# EAGLE board arduino (EAGLE 9.5.2)
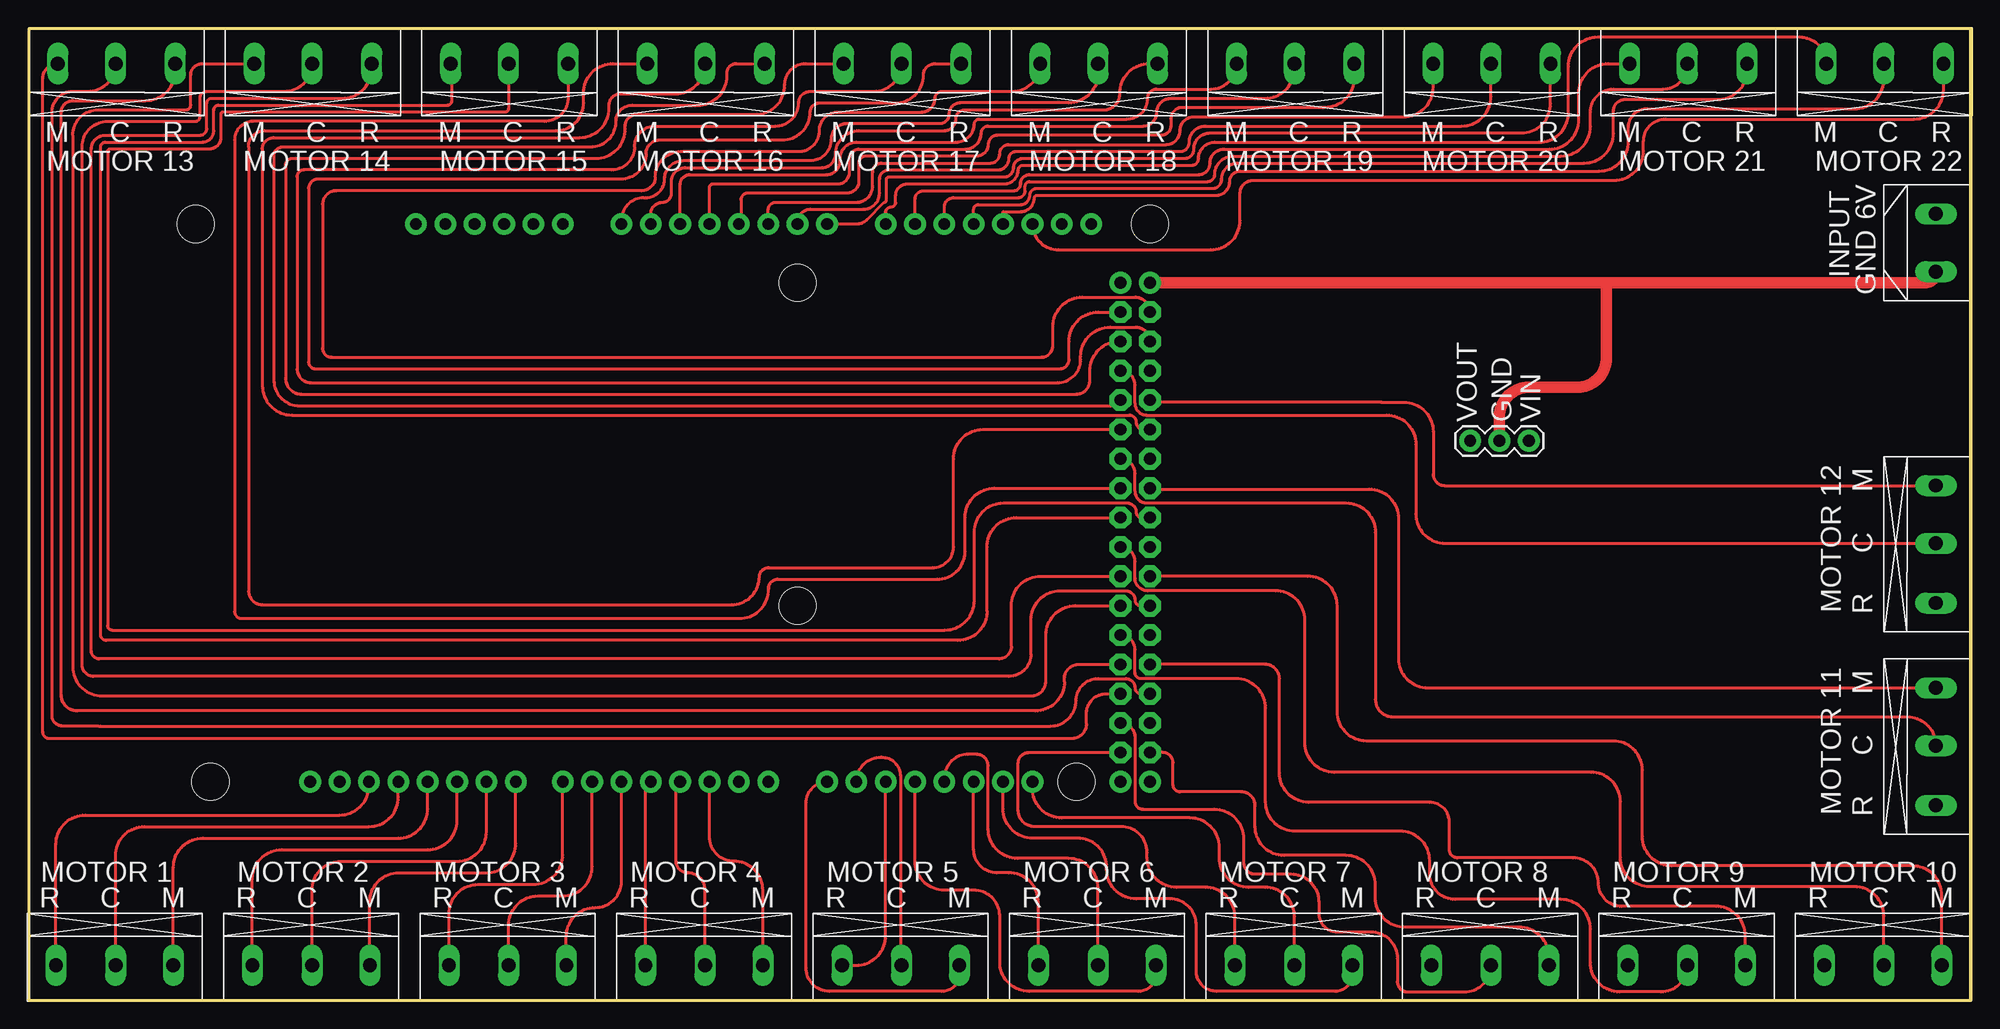
[diagram p0: board, top side]
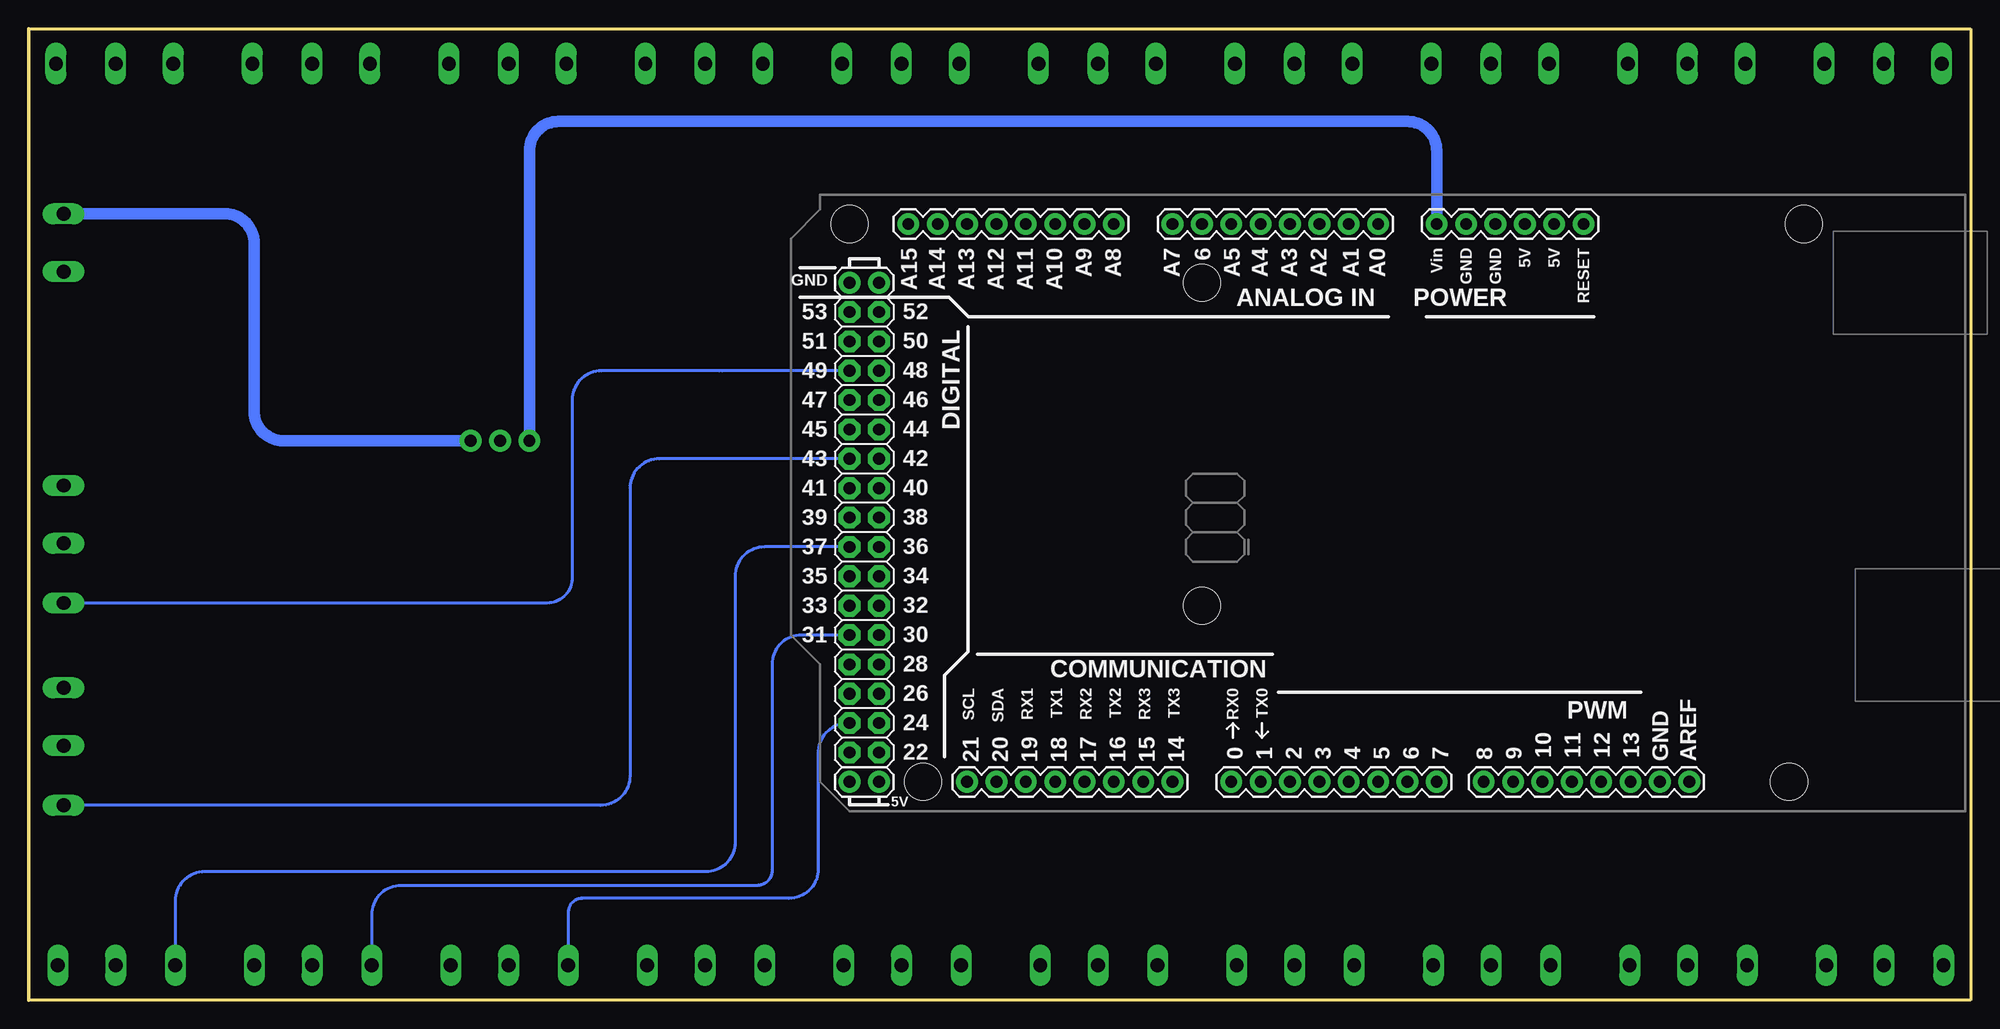
[diagram p1: board, bottom side, seen from below]

Size 168 x 84 mm. Coordinates in mm from the lower left corner, seen from the top.
Outline: 0,0 168,0 168,84 0,84 0,0
Copper layers (1*16): Top 0.0356mm / dielectric 1.5011mm / Bottom 0.0356mm
Design rules "oshpark-2layer": minimum track width 6mil, minimum drill 13mil, track to track 6mil, track to pad 6mil, pad to pad 6mil, via to via 6mil, smd to smd 6mil, copper to edge 15mil, drill to drill 6mil, minimum pad ring 7mil, minimum via ring 7mil, stop-mask expansion 2.5mil, vias tented up to drill 0mil, thermal gap 10mil

## Footprints (pad centres in the part's own frame; a part is rotated, then mirrored left to right if it is on the bottom)
ARDUINO_MEGA = drill 1.016 pad 1.88: 0 13.97,24.13; 1 11.43,24.13; 2 8.89,24.13; 3 6.35,24.13; 3.3V -13.97,-24.13; 4 3.81,24.13; 5 1.27,24.13; 5V@0 -11.43,-24.13; 5V@1 44.45,24.13; 5V@2 46.99,24.13; 6 -1.27,24.13; 7 -3.81,24.13; 8 -7.874,24.13; 9 -10.414,24.13; 10 -12.954,24.13; 11 -15.494,24.13; 12 -18.034,24.13; 13 -20.574,24.13; 14 19.05,24.13; 15 21.59,24.13; 16 24.13,24.13; 17 26.67,24.13; 18 29.21,24.13; 19 31.75,24.13; 20 34.29,24.13; 21 36.83,24.13; A0 1.27,-24.13; A1 3.81,-24.13; A2 6.35,-24.13; A3 8.89,-24.13; A4 11.43,-24.13; A5 13.97,-24.13; A6 16.51,-24.13; A7 19.05,-24.13; A8 24.13,-24.13; A9 26.67,-24.13; A10 29.21,-24.13; A11 31.75,-24.13; A12 34.29,-24.13; A13 36.83,-24.13; A14 39.37,-24.13; A15 41.91,-24.13; AREF -25.654,24.13; GND@0 -8.89,-24.13; GND@1 -6.35,-24.13; GND@2 44.45,-19.05; GND@3 46.99,-19.05; GND@4 -23.114,24.13; RESET -16.51,-24.13; VIN -3.81,-24.13 | drill 1.016 pad 1.88 octagon: 22 44.45,21.59; 23 46.99,21.59; 24 44.45,19.05; 25 46.99,19.05; 26 44.45,16.51; 27 46.99,16.51; 28 44.45,13.97; 29 46.99,13.97; 30 44.45,11.43; 31 46.99,11.43; 32 44.45,8.89; 33 46.99,8.89; 34 44.45,6.35; 35 46.99,6.35; 36 44.45,3.81; 37 46.99,3.81; 38 44.45,1.27; 39 46.99,1.27; 40 44.45,-1.27; 41 46.99,-1.27; 42 44.45,-3.81; 43 46.99,-3.81; 44 44.45,-6.35; 45 46.99,-6.35; 46 44.45,-8.89; 47 46.99,-8.89; 48 44.45,-11.43; 49 46.99,-11.43; 50 44.45,-13.97; 51 46.99,-13.97; 52 44.45,-16.51; 53 46.99,-16.51 | hole 3.2: -34.29,24.13; -35.56,-24.13; 16.51,8.89; 16.51,-19.05; 40.64,24.13; 46.99,-24.13
KF301-2P = drill 1.2 pad 1.778 long: 1 -2.5,0; 2 2.5,0
KF301-3P = drill 1.2 pad 1.778 long: 1 -2.5,0; 2 2.5,0; 3 7.66,0
1X03 = drill 1.016 pad 1.88: 1 0,0; 2 2.54,0; 3 5.08,0

## Placement (x,y rotation side)
B1  ARDUINO_MEGA_R3FULL  [ARDUINO_MEGA]  50,43 180 bottom
FRAME1  FRAME-LETTERNO_PACKAGE  [DUMMY]  -81.28,70.48 0 top  (outside the outline)
INPUT  TERMINAL_2P  [KF301-2P]  165,65.5 270 top
MOTOR1  KF301-3P  [KF301-3P]  146,3 180 top
MOTOR2  KF301-3P  [KF301-3P]  5,81 0 top
MOTOR3  KF301-3P  [KF301-3P]  129,3 180 top
MOTOR4  KF301-3P  [KF301-3P]  112,3 180 top
MOTOR5  KF301-3P  [KF301-3P]  95,3 180 top
MOTOR6  KF301-3P  [KF301-3P]  78,3 180 top
MOTOR7  KF301-3P  [KF301-3P]  90,81 0 top
MOTOR8  KF301-3P  [KF301-3P]  107,81 0 top
MOTOR9  KF301-3P  [KF301-3P]  124,81 0 top
MOTOR10  KF301-3P  [KF301-3P]  158,81 0 top
MOTOR11  KF301-3P  [KF301-3P]  141,81 0 top
MOTOR15  KF301-3P  [KF301-3P]  22,81 0 top
MOTOR16  KF301-3P  [KF301-3P]  163,3 180 top
MOTOR17  KF301-3P  [KF301-3P]  39,81 0 top
MOTOR18  KF301-3P  [KF301-3P]  165,24.5 270 top
MOTOR19  KF301-3P  [KF301-3P]  56,81 0 top
MOTOR20  KF301-3P  [KF301-3P]  165,42 270 top
MOTOR21  KF301-3P  [KF301-3P]  73,81 0 top
MOTOR23  KF301-3P  [KF301-3P]  61,3 180 top
MOTOR24  KF301-3P  [KF301-3P]  44,3 180 top
MOTOR25  KF301-3P  [KF301-3P]  27,3 180 top
MOTOR26  KF301-3P  [KF301-3P]  10,3 180 top
REGULATOR  [1X03]  129.78,48.37 180 top

## Library data of the parts
B1 = SparkFun-Boards
FRAME1 = SparkFun-Aesthetics; DESIGNER: Nobody; VERSION: v01
INPUT = KF301-2P-Terminal
MOTOR1-MOTOR11 MOTOR15-MOTOR21 MOTOR23-MOTOR26 = KF301-3P
REGULATOR = SparkFun-Connectors

## Nets
GND: B1.GND@3 INPUT.2 REGULATOR.2
N$1: B1.2 MOTOR23.1
N$2: B1.3 MOTOR23.2
N$3: B1.4 MOTOR23.3
N$4: B1.5 MOTOR24.1
N$5: B1.6 MOTOR24.2
N$6: B1.7 MOTOR24.3
N$7: B1.8 MOTOR25.1
N$8: B1.9 MOTOR25.2
N$9: B1.10 MOTOR25.3
N$10: B1.13 MOTOR26.3
N$11: B1.11 MOTOR26.1
N$12: B1.12 MOTOR26.2
N$13: B1.14 MOTOR6.1
N$14: B1.15 MOTOR6.2
N$15: B1.16 MOTOR6.3
N$16: B1.17 MOTOR5.1
N$17: B1.18 MOTOR5.2
N$18: B1.19 MOTOR5.3
N$19: B1.20 MOTOR4.1
N$20: B1.21 MOTOR4.2
N$21: B1.22 MOTOR4.3
N$22: B1.23 MOTOR3.1
N$23: B1.24 MOTOR3.2
N$24: B1.25 MOTOR3.3
N$25: B1.26 MOTOR2.1
N$26: B1.27 MOTOR2.2
N$27: B1.28 MOTOR2.3
N$28: B1.29 MOTOR1.1
N$29: B1.30 MOTOR1.2
N$30: B1.31 MOTOR1.3
N$31: B1.32 MOTOR15.1
N$32: B1.33 MOTOR15.2
N$33: B1.34 MOTOR15.3
N$34: B1.35 MOTOR16.1
N$35: B1.36 MOTOR16.2
N$36: B1.37 MOTOR16.3
N$37: B1.38 MOTOR17.1
N$38: B1.39 MOTOR17.2
N$39: B1.40 MOTOR17.3
N$40: B1.41 MOTOR18.1
N$41: B1.42 MOTOR18.2
N$42: B1.43 MOTOR18.3
N$43: B1.44 MOTOR19.1
N$44: B1.45 MOTOR19.2
N$45: B1.46 MOTOR19.3
N$46: B1.47 MOTOR20.1
N$47: B1.48 MOTOR20.2
N$48: B1.49 MOTOR20.3
N$49: B1.50 MOTOR21.1
N$50: B1.51 MOTOR21.2
N$51: B1.52 MOTOR21.3
N$52: B1.53 MOTOR7.1
N$53: B1.A0 MOTOR7.2
N$54: B1.A1 MOTOR7.3
N$55: B1.A2 MOTOR8.1
N$56: B1.A3 MOTOR8.2
N$57: B1.A4 MOTOR8.3
N$58: B1.A5 MOTOR9.1
N$59: B1.A6 MOTOR9.2
N$60: B1.A7 MOTOR9.3
N$61: B1.A8 MOTOR10.1
N$62: B1.A12 MOTOR10.2
N$63: B1.A13 MOTOR10.3
N$64: B1.A9 MOTOR11.1
N$65: B1.A10 MOTOR11.2
N$66: B1.A11 MOTOR11.3
N$67: B1.VIN REGULATOR.3
PWR: INPUT.1 REGULATOR.1

## Tracks (layer width: path | path; a pad name or v marks a point on that pad's centre or on a via)
GND
  Top 1.016: REGULATOR.2 127.24,50.46 arc-90 129.78,53 133.96,53 arc90 136.5,55.54 136.5,62.05 | B1.GND@3 136.5,62.05 | 136.5,62.05 164.05,62.05 arc90 INPUT.2
N$1
  Top 0.254: MOTOR23.1 63.5,9.5 arc90 61,12 arc-90 58.89,14.11 B1.2
N$2
  Top 0.254: MOTOR23.2 58.5,9.5 arc90 57,11 arc-90 56,12 56,18.52 arc-90 B1.3
N$3
  Top 0.254: MOTOR23.3 53.34,18.4 arc-90 B1.4
N$4
  Top 0.254: MOTOR24.1 46.5,5.5 arc-90 49,8 arc90 51.27,10.27 B1.5
N$5
  Top 0.254: MOTOR24.2 41.5,6.46 arc-90 44.04,9 46.19,9 arc90 48.73,11.54 B1.6
N$6
  Top 0.254: MOTOR24.3 36.34,7.46 arc-90 38.88,10 43.65,10 arc90 46.19,12.54 B1.7
N$7
  Top 0.254: MOTOR25.1 29.5,8.5 arc-90 32,11 39.59,11 arc90 42.13,13.54 B1.8
N$8
  Top 0.254: MOTOR25.2 24.5,9.5 arc-90 27,12 37.05,12 arc90 39.59,14.54 B1.9
N$9
  Top 0.254: MOTOR25.3 19.34,10.46 arc-90 21.88,13 34.51,13 arc90 37.05,15.54 B1.10
N$10
  Top 0.254: MOTOR26.3 2.34,13.46 arc-90 4.88,16 26.89,16 arc90 29.43,18.54 B1.13
N$11
  Top 0.254: MOTOR26.1 12.5,11.46 arc-90 15.04,14 31.97,14 arc90 34.51,16.54 B1.11
N$12
  Top 0.254: MOTOR26.2 7.5,12.5 arc-90 10,15 29.43,15 arc90 31.97,17.54 B1.12
N$13
  Top 0.254: MOTOR6.1 80.5,2.25 arc-90 79,0.75 69.25,0.75 arc-90 67.25,2.75 67.25,17.07 arc-90 B1.14
N$14
  Top 0.254: B1.15 arc-90 73.72,21 73.8,21 arc-90 75.4,19.4 75.4,3.1 arc90 MOTOR6.2
N$15
  Top 0.254: MOTOR6.3 71.59,3 arc90 74.13,5.54 B1.16
N$16
  Top 0.254: MOTOR5.1 97.5,2.25 arc-90 96,0.75 86.54,0.75 arc-90 84,3.29 84,7.25 arc90 81.75,9.5 79.21,9.5 arc-90 76.67,12.04 B1.17
N$17
  Top 0.254: MOTOR5.2 92.5,9.71 arc90 89.96,12.25 85.54,12.25 arc-90 83,14.79 83,20.25 arc90 82,21.25 81.25,21.25 arc90 79.21,19.21 B1.18
N$18
  Top 0.254: MOTOR5.3 87.34,8.46 arc90 84.8,11 83.75,11 arc-90 81.75,13 B1.19
N$19
  Top 0.254: MOTOR4.1 114.5,2.25 arc-90 113,0.75 102.75,0.75 arc-90 101,2.5 101,6.5 arc90 98.75,8.75 95.79,8.75 arc-90 93.25,11.29 93.25,11.5 arc90 90.75,14 86.83,14 arc-90 84.29,16.54 B1.20
N$20
  Top 0.254: MOTOR4.2 109.5,7.21 arc90 106.96,9.75 105.54,9.75 arc-90 103,12.29 103,13.21 arc90 100.46,15.75 89.37,15.75 arc-90 86.83,18.29 B1.21
N$21
  Top 0.254: MOTOR4.3 104.34,7.21 arc90 101.8,9.75 99.29,9.75 arc-90 96.75,12.29 96.75,12.75 arc90 94.5,15 87,15 arc-90 85.6,16.4 85.6,20.5 arc-90 86.51,21.41 B1.22
N$22
  Top 0.254: MOTOR3.1 131.5,3.76 arc90 128.96,6.3 119.04,6.3 arc-90 116.5,8.84 116.5,9.96 arc90 113.96,12.5 108.6,12.5 arc-90 106.1,15 106.1,16.8 arc90 104.9,18 99.6,18 arc-90 99,18.6 99,20.5 arc90 98.09,21.41 B1.23
N$23
  Top 0.254: B1.24 arc-90 95.7,22.7 95.7,17.2 arc90 96.4,16.5 102.56,16.5 arc-90 105.1,13.96 105.1,11.9 arc90 106.1,10.9 109.2,10.9 arc-90 111.6,8.5 111.6,7.5 arc90 113.2,5.9 116.1,5.9 arc-90 118.4,3.6 118.4,1.6 arc90 119.3,0.7 124.2,0.7 arc90 MOTOR3.2
N$24
  Bottom 0.254: B1.25 97.16,23.95 arc-90 99.7,21.41 99.7,11.34 arc90 102.24,8.8 120.1,8.8 arc-90 121.34,7.56 MOTOR3.3
N$25
  Top 0.254: B1.26 93.19,26.49 arc90 91.5,24.8 91.5,23.9 arc-90 90.2,22.6 1.8,22.6 arc-90 1.2,23.2 1.2,79.7 arc-90 MOTOR2.1
N$26
  Top 0.254: B1.27 96.21,26.49 arc-90 95.7,27 arc90 94.9,27.8 92.5,27.8 arc90 90.6,25.9 arc-90 88.4,23.7 6.2,23.7 6.04,23.7 2.9,23.7 arc-90 2,24.6 2,76.8 arc-90 3.8,78.6 5.1,78.6 arc90 MOTOR2.2
N$27
  Top 0.254: B1.28 90.83,29.03 arc90 89.6,27.8 89.6,27.54 arc-90 87.06,25 4.2,25 arc-90 2.8,26.4 2.8,76.8 arc-90 3.8,77.8 10.12,77.8 arc90 12.66,80.34 MOTOR2.3
N$28
  Top 0.254: MOTOR1.1 148.5,5.56 arc90 145.96,8.1 137.8,8.1 arc-90 135.8,10.1 arc90 133.6,12.3 123.6,12.3 arc-90 122.9,13 122.9,15.4 arc90 121.2,17.1 110.74,17.1 arc-90 108.2,19.64 108.2,27.8 arc90 106.97,29.03 B1.29
N$29
  Top 0.254: MOTOR1.2 arc-90 141.2,0.7 137.64,0.7 arc-90 135.1,3.24 135.1,6.16 arc90 132.56,8.7 123.4,8.7 arc-90 121.2,10.9 121.2,12.06 arc90 118.66,14.6 109.54,14.6 arc-90 107,17.14 107,25.26 arc90 104.46,27.8 96.2,27.8 arc-90 95.7,28.3 95.7,30.32 arc90 B1.30
N$30
  Bottom 0.254: B1.31 101.16,31.57 arc-90 103.7,29.03 103.7,11.2 arc90 105,9.9 135.8,9.9 arc-90 138.34,7.36 MOTOR1.3
N$31
  Top 0.254: B1.32 90.54,34.11 arc90 88,31.57 88,27.6 arc-90 86.7,26.3 6.34,26.3 arc-90 3.8,28.84 3.8,74.8 arc-90 6,77 13.6,77 arc90 14,77.4 14,80 arc-90 15,81 MOTOR15.1
N$32
  Top 0.254: B1.33 96.19,34.11 arc-90 95.7,34.6 arc90 94.9,35.4 89.24,35.4 arc90 86.7,32.86 86.7,29.9 arc-90 84.8,28 5.6,28 arc-90 4.6,29 4.6,73.8 arc-90 6.8,76 14.4,76 arc90 14.8,76.4 14.8,78 arc-90 15.4,78.6 22.1,78.6 arc90 MOTOR15.2
N$33
  Top 0.254: B1.34 87.54,36.65 arc90 85,34.11 85,30.6 arc-90 83.9,29.5 6.1,29.5 arc-90 5.4,30.2 5.4,73.6 arc-90 6.6,74.8 14.8,74.8 arc90 15.4,75.4 15.4,77.6 arc-90 15.8,78 27.12,78 arc90 29.66,80.54 MOTOR15.3
N$34
  Top 0.254: MOTOR16.1 165.5,9.06 arc90 162.96,11.6 142.14,11.6 arc-90 139.6,14.14 139.6,19.9 arc90 137.1,22.4 115.74,22.4 arc-90 113.2,24.94 113.2,34.11 arc90 110.66,36.65 B1.35
N$35
  Top 0.254: MOTOR16.2 160.5,7.26 arc90 157.96,9.8 140.24,9.8 arc-90 137.7,12.34 137.7,17.16 arc90 135.16,19.7 112.94,19.7 arc-90 110.4,22.24 110.4,32.86 arc90 107.86,35.4 96.8,35.4 arc-90 95.7,36.5 95.7,37.94 arc90 B1.36
N$36
  Bottom 0.254: B1.37 104.36,39.19 arc-90 106.9,36.65 106.9,13.64 arc90 109.44,11.1 152.8,11.1 arc-90 155.34,8.56 MOTOR16.3
N$37
  Top 0.254: B1.38 85.44,41.73 arc90 82.9,39.19 82.9,33.64 arc-90 80.36,31.1 6.7,31.1 arc-90 6.2,31.6 6.2,73.8 arc-90 6.6,74.2 15,74.2 arc90 16,75.2 16,77 arc-90 16.4,77.4 36.2,77.4 arc90 36.6,77.8 36.6,80.9 arc90 MOTOR17.1
N$38
  Top 0.254: MOTOR17.2 41.5,77.1 arc-90 41.2,76.8 16.8,76.8 arc90 16.6,76.6 16.6,74.6 arc-90 15.6,73.6 7,73.6 arc90 6.8,73.4 6.8,32.4 arc90 7.2,32 79.26,32 arc90 81.8,34.54 81.8,40.46 arc-90 84.34,43 95,43 arc-90 95.8,42.2 arc90 96.27,41.73 B1.39
N$39
  Top 0.254: MOTOR17.3 46.66,78.06 arc-90 44.6,76 19.4,76 arc90 17.8,74.4 17.8,33.6 arc90 18.4,33 61.46,33 arc90 64,35.54 64,35.6 arc-90 64.8,36.4 78.6,36.4 arc90 81,38.8 81,41.73 arc-90 83.54,44.27 B1.40
N$40
  Top 0.254: B1.41 arc90 97.06,44.2 115.96,44.2 arc-90 118.5,41.66 118.5,29.54 arc90 121.04,27 MOTOR18.1
N$41
  Top 0.254: B1.42 arc-90 95.7,45.56 95.7,44 arc90 96.7,43 113.96,43 arc-90 116.5,40.46 116.5,26 arc90 118,24.5 162.5,24.5 arc-90 MOTOR18.2
N$42
  Bottom 0.254: MOTOR18.3 118.54,16.84 arc-90 116,19.38 116,44.27 arc90 113.46,46.81 B1.43
N$43
  Top 0.254: B1.44 82.54,49.35 arc90 80,46.81 80,39.2 arc-90 78.2,37.4 64,37.4 arc90 63.2,36.6 arc-90 60.8,34.2 20.2,34.2 arc-90 19,35.4 19,73.8 arc-90 20.4,75.2 45.6,75.2 arc90 48,77.6 48,78.46 arc-90 50.54,81 MOTOR19.1
N$44
  Top 0.254: B1.45 96.45,49.35 arc-90 95.8,50 arc90 95.2,50.6 22.74,50.6 arc-90 20.2,53.14 20.2,73.6 arc-90 21.2,74.6 47.66,74.6 arc90 50.2,77.14 50.2,77.4 arc-90 51.2,78.4 55.96,78.4 arc90 58.5,80.94 MOTOR19.2
N$45
  Top 0.254: B1.46 arc-90 93.96,51.4 23.4,51.4 arc-90 21.2,53.6 21.2,73 arc-90 22,73.8 48.6,73.8 arc90 50.8,76 arc-90 52.2,77.4 57.86,77.4 arc90 60.4,79.94 60.4,80.2 arc-90 61.2,81 MOTOR19.3
N$46
  Top 0.254: B1.47 arc90 97.18,51.7 117,51.7 117.06,51.7 118.96,51.7 arc-90 121.5,49.16 121.5,45.5 arc90 122.5,44.5 MOTOR20.1
N$47
  Top 0.254: B1.48 arc-90 95.7,53.18 95.7,51.6 arc90 96.7,50.6 117.46,50.6 arc-90 120,48.06 120,42.04 arc90 122.54,39.5 MOTOR20.2
N$48
  Bottom 0.254: B1.49 108,54.43 108.26,54.43 118.46,54.43 arc-90 121,51.89 121,36.5 arc90 123.16,34.34 MOTOR20.3
N$49
  Top 0.254: B1.50 94.34,56.97 arc90 91.8,54.43 91.8,53.6 arc-90 90.6,52.4 23.6,52.4 arc-90 22.2,53.8 22.2,72.2 arc-90 22.8,72.8 49.06,72.8 arc90 51.6,75.34 51.6,75.6 arc-90 52.6,76.6 62.86,76.6 arc90 65.4,79.14 65.4,79.2 arc-90 67.2,81 MOTOR21.1
N$50
  Top 0.254: B1.51 arc90 95.76,58.2 93.54,58.2 arc90 91,55.66 91,55.4 arc-90 89,53.4 24.4,53.4 arc-90 23.2,54.6 23.2,71.2 arc-90 23.8,71.8 50.4,71.8 arc90 52.4,73.8 arc-90 54.2,75.6 64.6,75.6 arc90 66.6,77.6 arc-90 67.6,78.6 73.1,78.6 arc90 MOTOR21.2
N$51
  Top 0.254: B1.52 92.54,59.51 arc90 90,56.97 90,55.4 arc-90 89.2,54.6 24.8,54.6 arc-90 24.2,55.2 24.2,70.2 arc-90 25,71 51.2,71 arc90 53.4,73.2 arc-90 54.6,74.4 65.2,74.4 arc90 67.6,76.8 arc-90 68.4,77.6 75,77.6 arc90 77.4,80 arc-90 78.4,81 MOTOR21.3
N$52
  Top 0.254: B1.53 arc90 95.7,60.8 91.14,60.8 arc90 88.6,58.26 88.6,56.6 arc-90 87.6,55.6 26.2,55.6 arc-90 25.4,56.4 25.4,68.8 arc-90 26.6,70 53,70 arc90 54.2,71.2 arc-90 56.4,73.4 66.6,73.4 arc90 68.4,75.2 arc-90 70,76.8 77.2,76.8 arc90 78.4,78 arc-90 79,78.6 85.1,78.6 arc90 MOTOR7.1
N$53
  Top 0.254: MOTOR7.2 92.5,80.14 arc-90 89.96,77.6 80.6,77.6 arc90 79.6,76.6 arc-90 78.8,75.8 70.8,75.8 arc90 69.4,74.4 arc-90 67.6,72.6 56.6,72.6 arc90 55,71 arc-90 53.4,69.4 53.2,69.4 arc90 51.27,67.47 B1.A0
N$54
  Top 0.254: MOTOR7.3 96.94,81 arc90 94.4,78.46 94.4,78.4 arc-90 93,77 81,77 arc90 80.2,76.2 arc-90 79.2,75.2 71.8,75.2 arc90 69.8,73.2 arc-90 68.6,72 56.8,72 arc90 55.6,70.8 55.6,69.8 arc-90 54.8,69 arc90 53.81,68.01 B1.A1
N$55
  Top 0.254: MOTOR8.1 arc-90 102.3,78.8 97.6,78.8 arc90 96.8,78 arc-90 95,76.2 82.2,76.2 arc90 81.8,75.8 arc-90 80.2,74.2 71.6,74.2 arc90 70.2,72.8 70.2,72.6 arc-90 69,71.4 57.2,71.4 arc90 56.35,70.55 B1.A2
N$56
  Top 0.254: MOTOR8.2 109.5,80.54 arc-90 106.96,78 98.8,78 arc90 97.6,76.8 arc-90 96.4,75.6 83,75.6 arc90 82.4,75 arc-90 81,73.6 71.8,73.6 arc90 71,72.8 71,71.6 arc-90 70,70.6 59.2,70.6 arc90 58.89,70.29 B1.A3
N$57
  Top 0.254: MOTOR8.3 114.66,79.74 arc-90 112.12,77.2 99.8,77.2 arc90 98.8,76.2 98.8,75.6 arc-90 98,74.8 83.8,74.8 arc90 83,74 arc-90 82,73 72.4,73 arc90 71.8,72.4 71.8,70.8 arc-90 70.8,69.8 62.2,69.8 arc90 61.6,69.2 61.6,67.3 arc-90 B1.A4
N$58
  Top 0.254: B1.A5 63.97,68.37 arc-90 64.6,69 71.6,69 arc90 73,70.4 73,71.6 arc-90 73.8,72.4 83.2,72.4 arc90 84,73.2 arc-90 84.8,74 98.4,74 arc90 99.6,75.2 arc-90 100.8,76.4 118.96,76.4 arc90 121.5,78.94 MOTOR9.1
N$59
  Top 0.254: B1.A6 66.51,67.31 arc-90 67.6,68.4 72.2,68.4 arc90 73.6,69.8 73.6,71 arc-90 74.4,71.8 83,71.8 83.2,71.8 83.8,71.8 arc90 84.8,72.8 arc-90 85.4,73.4 99.6,73.4 arc90 100.4,74.2 arc-90 101.8,75.6 123.96,75.6 arc90 126.5,78.14 MOTOR9.2
N$60
  Top 0.254: B1.A7 71.6,67.13 arc45 72.5,67.5 74,69 arc90 74.2,69.2 74.2,71 arc-90 74.4,71.2 84.4,71.2 arc90 85.2,72 arc-90 86,72.8 100,72.8 arc90 100.8,73.6 arc-90 102.2,75 129.12,75 arc90 131.66,77.54 MOTOR9.3
N$61
  Top 0.254: B1.A8 74.13,68.13 arc-90 74.6,68.6 arc90 75,69 75,69.6 arc-90 76,70.6 84.4,70.6 arc90 85.6,71.8 arc-90 86,72.2 100.6,72.2 arc90 101.2,72.8 arc-90 102.6,74.2 130.66,74.2 arc90 133.2,76.74 133.2,80.76 arc-90 135.74,83.3 153.2,83.3 arc-90 MOTOR10.1
N$62
  Top 0.254: B1.A12 84.29,68.2 85.8,68.2 arc90 87,69.4 arc-90 87.2,69.6 102.7,69.6 arc90 103.9,70.8 arc-90 104.8,71.7 125.2,71.7 125.3,71.7 135.86,71.7 arc90 138.4,74.24 138.4,75.5 arc-90 140,77.1 157.96,77.1 arc90 160.5,79.64 MOTOR10.2
N$63
  Top 0.254: B1.A13 arc90 89.06,64.9 102.26,64.9 arc90 104.8,67.44 104.8,69.8 arc-90 105.9,70.9 137.16,70.9 arc90 139.7,73.44 139.7,74.3 arc-90 141.6,76.2 163.12,76.2 arc90 165.66,78.74 MOTOR10.3
N$64
  Top 0.254: B1.A9 76.67,69.27 arc-90 77.4,70 85.2,70 arc90 85.8,70.6 arc-90 86.6,71.4 101.2,71.4 arc90 102.2,72.4 arc-90 103.4,73.6 131.56,73.6 arc90 134.1,76.14 134.1,78.46 arc-90 136.64,81 MOTOR11.1
N$65
  Top 0.254: B1.A10 79.21,68.61 arc-90 80,69.4 85.6,69.4 arc90 86.2,70 86.2,70.4 arc-90 86.6,70.8 102,70.8 arc90 102.6,71.4 arc-90 104.2,73 132.56,73 arc90 135.1,75.54 135.1,76.8 arc-90 137.1,78.8 141.4,78.8 arc90 143.5,80.9 MOTOR11.2
N$66
  Top 0.254: B1.A11 81.75,68.4 arc-90 82.15,68.8 85.8,68.8 arc90 86.6,69.6 arc-90 87.2,70.2 102.4,70.2 arc90 103.2,71 arc-90 104.6,72.4 134.56,72.4 arc90 137.1,74.94 137.1,76.9 arc-90 138.1,77.9 146.12,77.9 arc90 148.66,80.44 MOTOR11.3
N$67
  Bottom 1.016: REGULATOR.3 124.7,73.46 arc90 122.16,76 48.73,76 arc90 46.19,73.46 B1.VIN
PWR
  Bottom 1.016: INPUT.1 151.04,68 arc90 148.5,65.46 148.5,50.91 arc-90 145.96,48.37 REGULATOR.1

## Text on the board
tPlace: M C R | M C R | M C R | M C R | M C R | M C R | M C R | M C R | M C R | M C R | MOTOR 13 | MOTOR 14 | MOTOR 15 | MOTOR 16 | MOTOR 17 | MOTOR 18 | MOTOR 19 | MOTOR 20 | MOTOR 21 | MOTOR 22 | 6V | GND | VOUT | GND | VIN | MOTOR 12 | R C M | MOTOR 11 | R C M | MOTOR 1 | MOTOR 2 | MOTOR 3 | MOTOR 4 | MOTOR 5 | MOTOR 6 | MOTOR 7 | MOTOR 8 | MOTOR 9 | MOTOR 10 | R C M | R C M | R C M | R C M | R C M | R C M | R C M | R C M | R C M | R C M